# EAGLE board sumorobot (EAGLE 5.11)
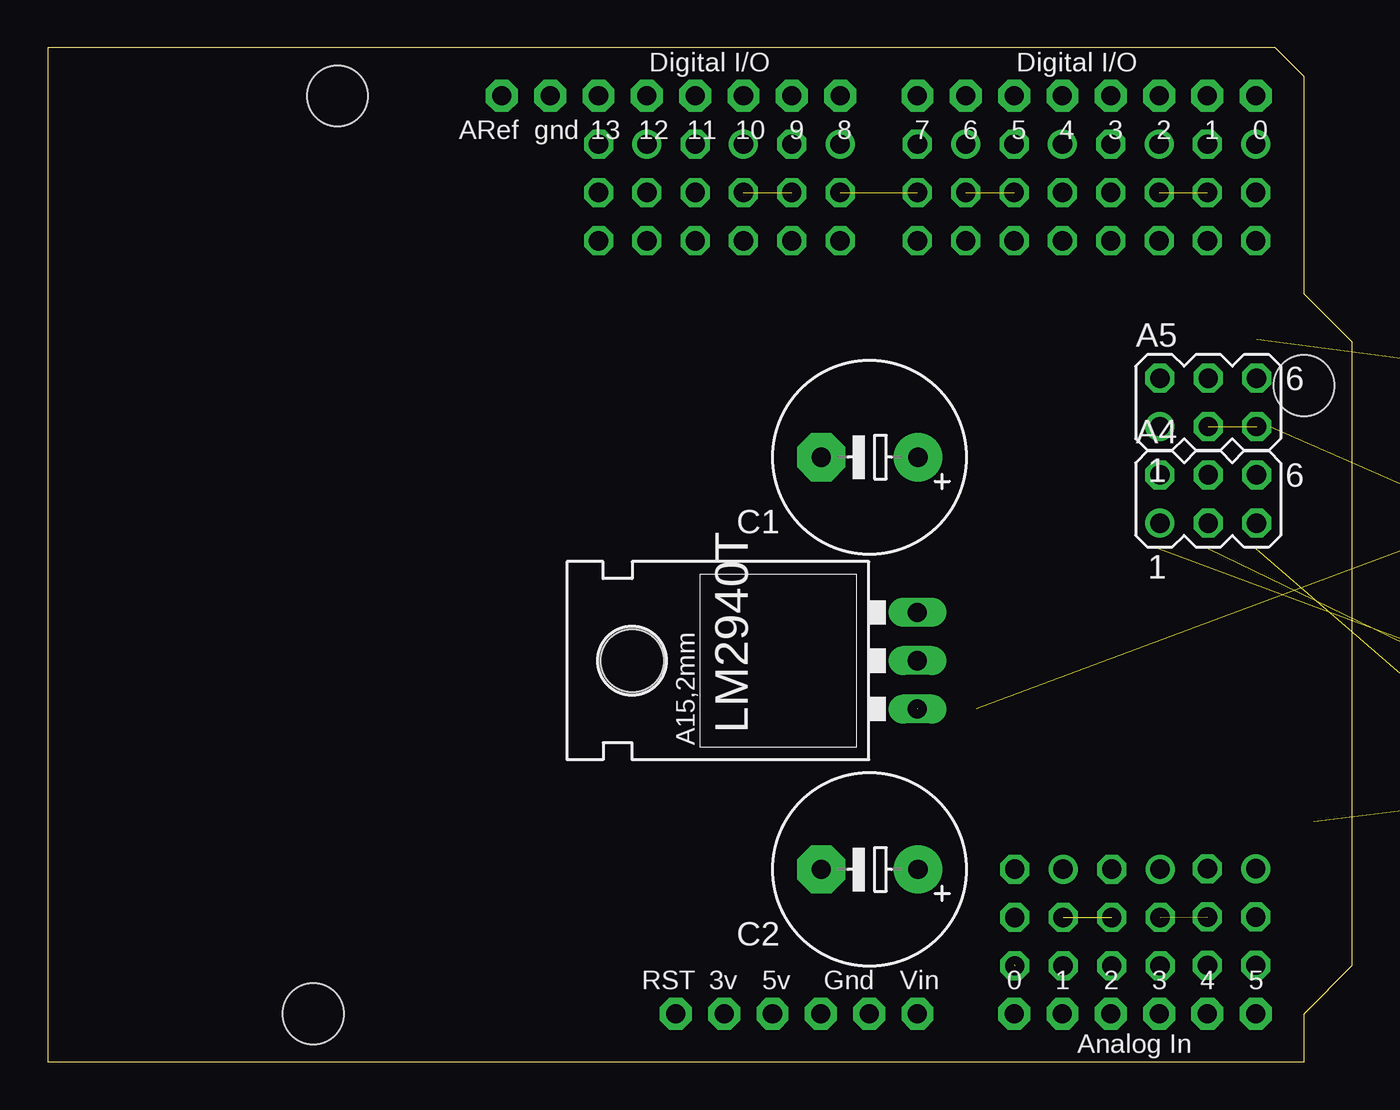
[diagram p0: board, top side]
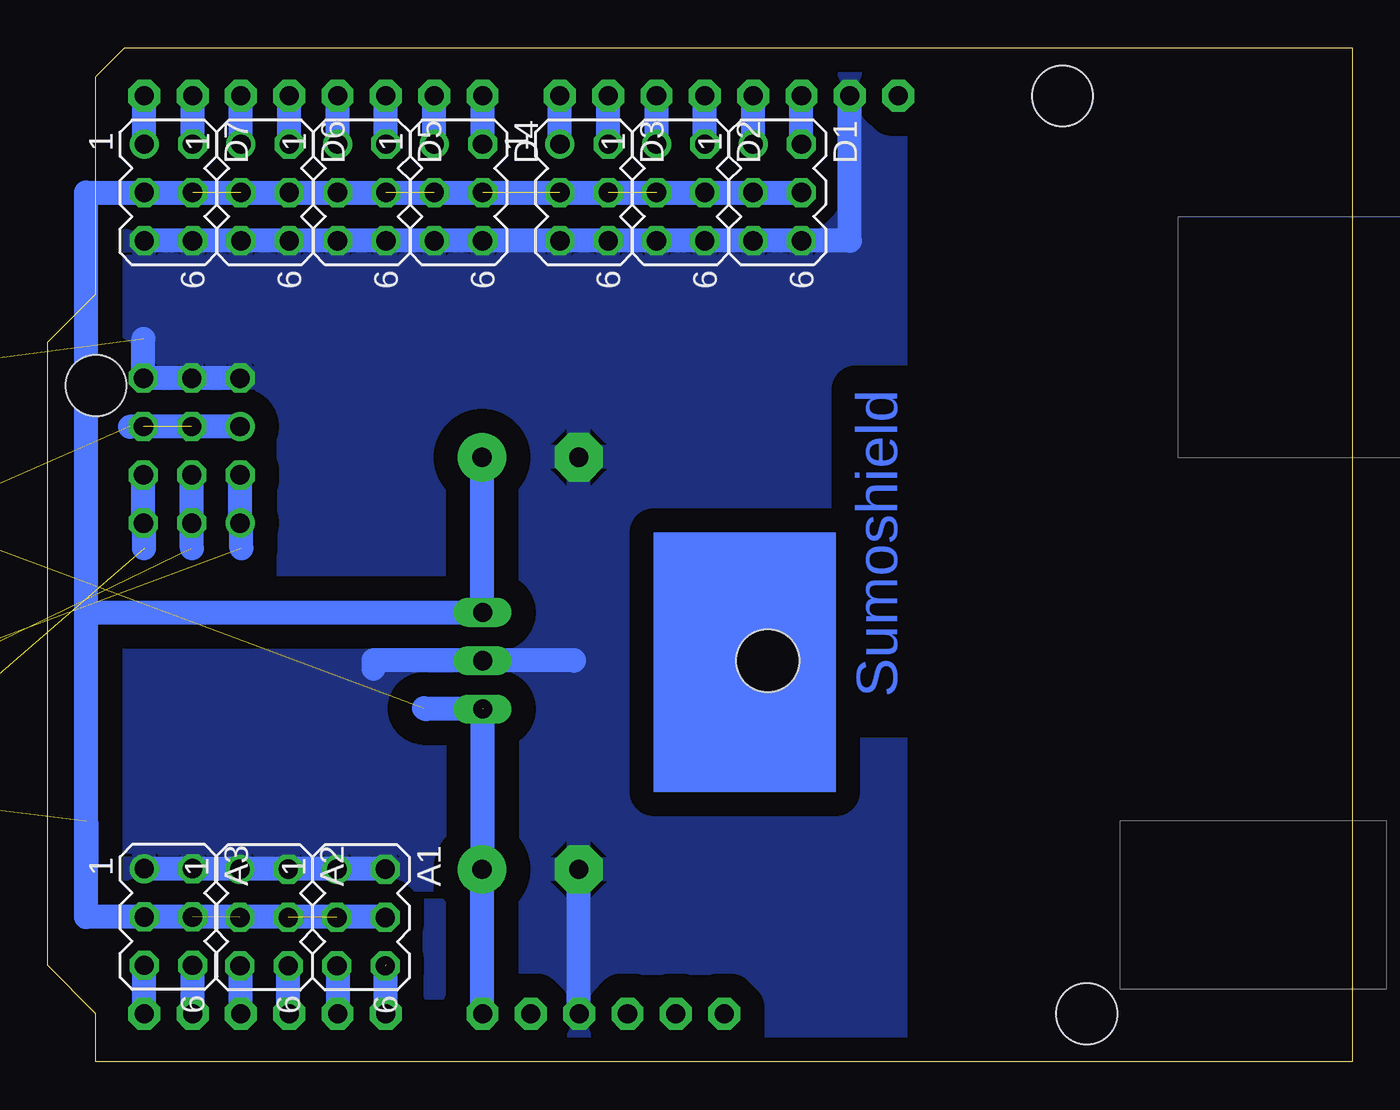
[diagram p1: board, bottom side, seen from below]

Size 68.58 x 53.34 mm. Coordinates in mm from the lower left corner, seen from the top.
Copper layers (1*16): Top 0.035mm / dielectric 1.5mm / Bottom 0.035mm
Design rules "default": minimum track width 10mil, minimum drill 24mil, track to track 8mil, track to pad 8mil, pad to pad 8mil, via to via 8mil, smd to smd 8mil, copper to edge 40mil, drill to drill 8mil, minimum pad ring 10mil, minimum via ring 8mil, stop-mask expansion 4mil, vias tented up to drill 0mil, thermal gap 10mil

## Footprints (pad centres in the part's own frame; a part is rotated, then mirrored left to right if it is on the bottom)
MA03-2 = drill 1.016 round: 1 -2.54,-1.27 | drill 1.016 octagon: 2 -2.54,1.27; 3 0,-1.27; 4 0,1.27; 5 2.54,-1.27; 6 2.54,1.27
E5-10,5 = drill 1.016 pad 2.54 round: + -2.54,0 | drill 1.016 pad 2.54 octagon: - 2.54,0
C0805 = smd 1.3 x 1.5: 1 -0.95,0; 2 0.95,0
78XXL = drill 1.016 long: GND 0,-3.81; IN -2.54,-3.81; OUT 2.54,-3.81 | hole 3.302: 0,11.176
R0805 = smd 1.3 x 1.5: 1 -0.95,0; 2 0.95,0
ARDUINO = drill 1 pad 1.676 octagon: 3V 35.56,2.54; 5V 38.1,2.54; A0 50.8,2.54; A1 53.34,2.54; A2 55.88,2.54; A3 58.42,2.54; A4 60.96,2.54; A5 63.5,2.54; AREF 23.876,50.8; D0 63.5,50.8; D1 60.96,50.8; D2 58.42,50.8; D3 55.88,50.8; D4 53.34,50.8; D5 50.8,50.8; D6 48.26,50.8; D7 45.72,50.8; D8 41.656,50.8; D9 39.116,50.8; D10 36.576,50.8; D11 34.036,50.8; D12 31.496,50.8; D13 28.956,50.8; GND 26.416,50.8; GND1 43.18,2.54; GND2 40.64,2.54; RESET 33.02,2.54; VIN 45.72,2.54 | hole 3.2: 15.24,50.8; 66.04,35.56; 13.97,2.54

## Placement (x,y rotation side)
A1  [MA03-2]  52.1,7.6 270 bottom
A2  [MA03-2]  57.2,7.6 270 bottom
A3  [MA03-2]  62.23,7.62 270 bottom
A4  [MA03-2]  61,29.6 0 top
A5  [MA03-2]  61,34.68 0 top
C1  1000uF +5V  [E5-10,5]  43.2,31.8 180 top
C2  330uF +25V  [E5-10,5]  43.2,10.13 180 top
C3  0.1uF  [C0805]  80.77,35.62 0 bottom  (outside the outline)
C4  0.1uF  [C0805]  81.17,30.27 0 bottom  (outside the outline)
D1  [MA03-2]  30.23,45.72 270 bottom
D2  [MA03-2]  35.31,45.72 270 bottom
D3  [MA03-2]  40.39,45.72 270 bottom
D4  [MA03-2]  46.99,45.72 270 bottom
D5  [MA03-2]  52.07,45.72 270 bottom
D6  [MA03-2]  57.15,45.72 270 bottom
D7  [MA03-2]  62.23,45.72 270 bottom
LM2940T  +5V  [78XXL]  41.9,21.1 90 top
R1  10kohm  [R0805]  88.38,16.81 270 bottom  (outside the outline)
R2  10kohm  [R0805]  80.94,18.31 270 bottom  (outside the outline)
R3  10kohm  [R0805]  80.3,13.41 270 bottom  (outside the outline)
R4  270ohm  [R0805]  80.08,26.9 180 bottom  (outside the outline)
U$1  ARDUINOUNO  [ARDUINO]  0,0 0 top

## Library data of the parts
A1-A5 D1-D7 = con-lstb; OC_FARNELL: unknown; OC_NEWARK: unknown
C1-C4 R1-R4 = rcl
LM2940T = v-reg
U$1 = adafruit

## Nets
3V: U$1.3V
5V: U$1.5V
+5V: A1.4 A3.3 C1.+ C3.2 D1.4 D7.3 LM2940T.OUT R1.1 R2.1 R3.1 R4.2
D4: D4.1 U$1.D6
GND: A1.1 A1.2 A2.1 A2.2 A3.1 A3.2 A5.2 A5.4 A5.6 C1.- C2.- C3.1 C4.1 D1.5 D1.6 D2.5 D2.6 D3.5 D3.6 D4.5 D4.6 D5.5 D5.6 D6.5 D6.6 D7.5 D7.6 LM2940T.GND U$1.GND U$1.GND2
GND1: U$1.GND1
N$2: A3.6 U$1.A4
N$3: A2.3 A3.4
N$5: A1.3 A2.4
N$6: A3.5 U$1.A5
N$7: C2.+ C4.2 LM2940T.IN U$1.VIN
N$8: A1.6 U$1.A0
N$9: A1.5 U$1.A1
N$10: A5.1 A5.3 A5.5 R4.1
N$11: D5.1 U$1.D4
N$12: D6.2 U$1.D3
N$13: D6.1 U$1.D2
N$14: D7.2 U$1.D1
N$16: D6.3 D7.4
N$17: D6.4
N$19: D4.3 D5.4
N$21: D3.3 D4.4
N$24: D2.3 D3.4
N$25: D2.4
N$27: D1.2 U$1.D13
N$28: D1.1 U$1.D12
N$29: D2.2 U$1.D11
N$30: D2.1 U$1.D10
N$31: D3.2 U$1.D9
N$32: D3.1 U$1.D8
N$33: D4.2 U$1.D7
N$34: A2.6 U$1.A2
N$35: D5.2 U$1.D5
N$36: D7.1 U$1.D0
N$37: A2.5 U$1.A3
N$38: A4.3 A4.4 R2.2
N$39: A4.1 A4.2 R1.2
N$40: A4.5 A4.6 R3.2

## Tracks (layer width: path | path; a pad name or v marks a point on that pad's centre or on a via)
+5V  (5 unrouted)
  Bottom 1.27: D1.4 D7.3 66.55,45.72 66.55,23.64 | 66.55,12.65 66.55,7.62 A3.3 50.83,7.62 A1.4 | 66.55,12.65 66.55,10.42 | C1.+ 45.74,23.64 LM2940T.OUT 66.55,23.64 | 66.55,12.65 66.55,23.64
D4
  Bottom 1.27: D4.1 U$1.D6
GND  (2 unrouted)
  Bottom 1.27: U$1.GND 26.42,43.18 D1.6 D7.5 | A3.1 50.8,10.16 50.8,10.1 | U$1.GND2 40.66,2.54 C2.- | LM2940T.GND 40.92,21.1 40.92,21.12 51.45,21.12 51.45,20.67 | A5.2 A5.6 63.55,38.01 | D6.5 D7.6 | A3.2 63.6,10.16
  pour Bottom (isolate 1.27): 24,52 67.4,52 67.4,1.2 24,1.2
N$2
  Bottom 1.27: U$1.A4 A3.6
N$3  (1 unrouted)
N$5  (1 unrouted)
N$6
  Bottom 1.27: U$1.A5 A3.5
N$7  (2 unrouted)
  Bottom 1.27: U$1.VIN 45.74,2.54 C2.+ 45.7,10.13 45.7,18.6 | LM2940T.IN 48.7,18.56 48.8,18.6
N$8  (1 unrouted)
  Bottom 1.27: U$1.A0 50.8,5.1
N$9
  Bottom 1.27: A1.5 53.34,5.06 U$1.A1
N$10  (2 unrouted)
  Bottom 1.27: A5.1 A5.5 64.25,33.41
N$11
  Bottom 1.27: D5.1 U$1.D4
N$12
  Bottom 1.27: D6.2 U$1.D3
N$13
  Bottom 1.27: D6.1 U$1.D2
N$14
  Bottom 1.27: D7.2 U$1.D1
N$16  (1 unrouted)
N$19  (1 unrouted)
N$21  (1 unrouted)
N$24  (1 unrouted)
N$27
  Bottom 1.27: D1.2 U$1.D13
N$28
  Bottom 1.27: D1.1 U$1.D12
N$29
  Bottom 1.27: D2.2 U$1.D11
N$30
  Bottom 1.27: D2.1 U$1.D10
N$31
  Bottom 1.27: D3.2 U$1.D9
N$32
  Bottom 1.27: D3.1 U$1.D8
N$33
  Bottom 1.27: D4.2 U$1.D7
N$34
  Bottom 1.27: U$1.A2 55.93,2.54 A2.6
N$35
  Bottom 1.27: D5.2 U$1.D5
N$36
  Bottom 1.27: D7.1 U$1.D0
N$37
  Bottom 1.27: A2.5 58.42,5.06 U$1.A3
N$38  (1 unrouted)
  Bottom 1.27: A4.3 61,28.3 | A4.3 A4.4 | 61,27 A4.3
N$39  (1 unrouted)
  Bottom 1.27: A4.2 A4.1 58.4,28.33 58.4,27
N$40  (1 unrouted)
  Bottom 1.27: A4.6 A4.5 63.5,28.33 63.5,27
(copper drawn outside any net)
  shapes: Bottom area x1

## Text on the board
Bottom: Sumoshield